# EAGLE board PCB_Sensors (EAGLE 9.6.2)
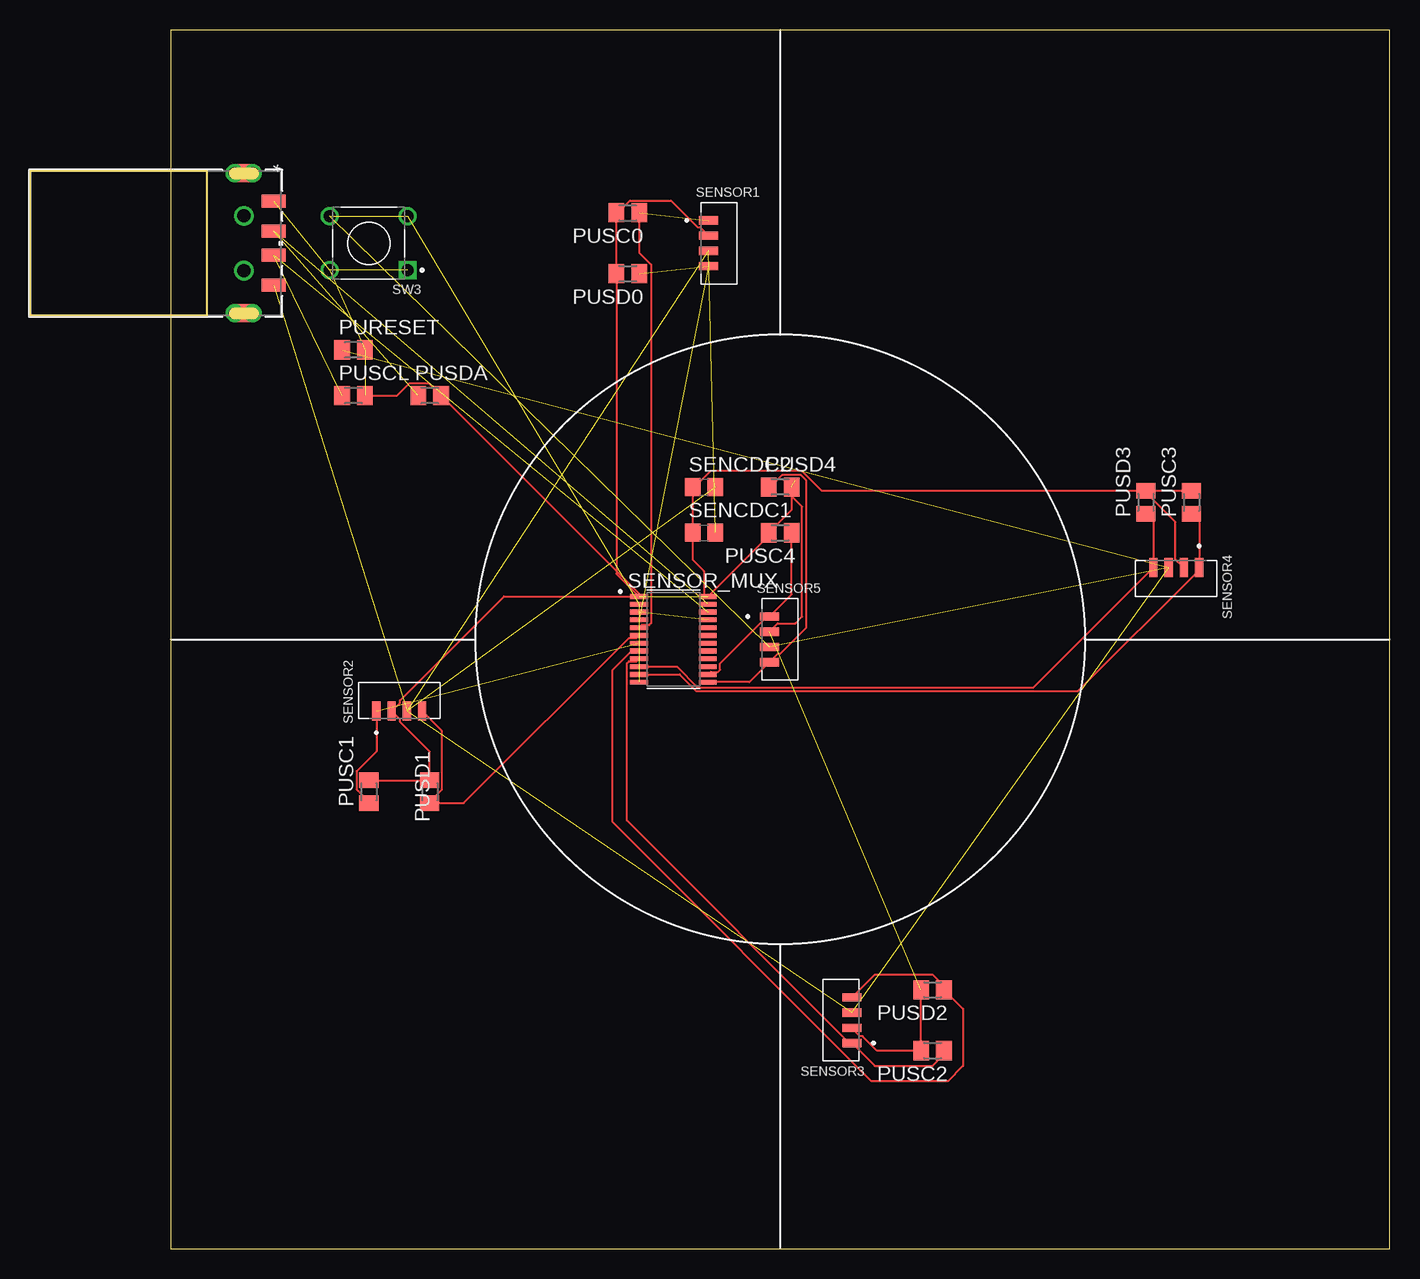
[diagram p0: board, top side]

Size 101.6 x 101.6 mm. Coordinates in mm from the lower left corner, seen from the top.
Outline: 0,0 101.6,0 101.6,101.6 0,101.6 0,0
Copper layers (1*16): Top 0.035mm / dielectric 1.5mm / Bottom 0.035mm
Design rules "default": minimum track width 6mil, minimum drill 0.35mm, track to track 6mil, track to pad 6mil, pad to pad 6mil, via to via 6mil, smd to smd 6mil, copper to edge 40mil, drill to drill 6mil, minimum pad ring 10mil, minimum via ring 8mil, stop-mask expansion 4mil, vias tented up to drill 0mil, thermal gap 10mil

## Footprints (pad centres in the part's own frame; a part is rotated, then mirrored left to right if it is on the bottom)
M0805 = smd 1.3 x 1.6: 1 -0.95,0; 2 0.95,0
C0805 = smd 1.3 x 1.5: 1 -0.95,0; 2 0.95,0
XDCR_VEML7700-TT = smd 1.6 x 0.7: 1 -0.9,1.905; 2 -0.9,0.635; 3 -0.9,-0.635; 4 -0.9,-1.905
SOP65P640X120-24N = smd 1.57 x 0.41: 1 -2.87,3.575; 2 -2.87,2.925; 3 -2.87,2.275; 4 -2.87,1.625; 5 -2.87,0.975; 6 -2.87,0.325; 7 -2.87,-0.325; 8 -2.87,-0.975; 9 -2.87,-1.625; 10 -2.87,-2.275; 11 -2.87,-2.925; 12 -2.87,-3.575; 13 2.87,-3.575; 14 2.87,-2.925; 15 2.87,-2.275; 16 2.87,-1.625; 17 2.87,-0.975; 18 2.87,-0.325; 19 2.87,0.325; 20 2.87,0.975; 21 2.87,1.625; 22 2.87,2.275; 23 2.87,2.925; 24 2.87,3.575
CONN_USB-AP-S-RA-SMT_ADM = smd 1.092 x 2.007: 1 -3.5,9.842; 2 -1,9.842; 3 1,9.842; 4 3.5,9.842 | drill 1.092 pad 1.092: 5 -2.286,7.366; 6 2.286,7.366 | smd 1.499 x 2.997: 7 -5.842,7.353; 8 5.842,7.353 | drill 0.991 pad 0.991: S_1_H1 -5.842,8.103; S_1_H2 -5.842,6.604; S_2_H1 5.842,8.103; S_2_H2 5.842,6.604
SW_1825910-6-4 = drill 0.99 square: 1 -3.25,2.25 | drill 0.99: 2 3.25,2.25; 3 -3.25,-2.25; 4 3.25,-2.25

## Placement (x,y rotation side)
PURESET  2.2k  [M0805]  15.24,74.93 0 top
PUSC0  2.2k  [M0805]  38.1,86.36 180 top
PUSC1  2.2k  [M0805]  16.51,38.1 90 top
PUSC2  2.2k  [M0805]  63.5,16.51 180 top
PUSC3  2.2k  [M0805]  85.09,62.23 90 top
PUSC4  2.2k  [M0805]  50.8,59.69 180 top
PUSCL  2.2k  [M0805]  15.24,71.12 0 top
PUSD0  2.2k  [M0805]  38.1,81.28 180 top
PUSD1  2.2k  [M0805]  21.59,38.1 90 top
PUSD2  2.2k  [M0805]  63.5,21.59 180 top
PUSD3  2.2k  [M0805]  81.28,62.23 90 top
PUSD4  2.2k  [M0805]  50.8,63.5 0 top
PUSDA  2.2k  [M0805]  21.59,71.12 0 top
SENCDC1  200pF  [C0805]  44.45,59.69 0 top
SENCDC2  200pF  [C0805]  44.45,63.5 0 top
SENSOR1  VEML7700-TT  [XDCR_VEML7700-TT]  45.72,83.82 0 top
SENSOR2  VEML7700-TT  [XDCR_VEML7700-TT]  19.05,45.72 90 top
SENSOR3  VEML7700-TT  [XDCR_VEML7700-TT]  55.88,19.05 180 top
SENSOR4  VEML7700-TT  [XDCR_VEML7700-TT]  83.82,55.88 270 top
SENSOR5  VEML7700-TT  [XDCR_VEML7700-TT]  50.8,50.8 0 top
SENSOR_MUX  TCA9548APWR  [SOP65P640X120-24N]  41.91,50.8 0 top
SENSOR_USBA_OUT  USB-AP-S-RA-SMT  [CONN_USB-AP-S-RA-SMT_ADM]  -1.27,83.82 270 top
SW3  1825910-6  [SW_1825910-6-4]  16.51,83.82 180 top

## Library data of the parts
PURESET PUSC0 PUSC1-PUSC4 PUSCL PUSD0 PUSD1-PUSD4 PUSDA = rcl; SPICEPREFIX: R
SENCDC1 SENCDC2 = rcl; SPICEPREFIX: C
SENSOR1-SENSOR5 = VEML7700-TT; AVAILABILITY: In Stock; CHECK_PRICES: https://www.snapeda.com/parts/VEML7700-TT/Vishay+Semiconductor+Opto+Division/view-part/?ref=eda; DESCRIPTION: Optical Sensor Ambient - I²C 4-SMD, J-Lead; MF: Vishay Semiconductor; MP: VEML7700-TT; PACKAGE: SMD-4 Vishay Semiconductor; PRICE: None; PURCHASE-URL: https://www.snapeda.com/api/url_track_click_mouser/?unipart_id=534245&manufacturer=Vishay Semiconductor&part_name=VEML7700-TT&search_term=veml7700; SNAPEDA_LINK: https://www.snapeda.com/parts/VEML7700-TT/Vishay+Semiconductor+Opto+Division/view-part/?ref=snap
SENSOR_MUX = TCA9548APWR; AVAILABILITY: In Stock; CHECK_PRICES: https://www.snapeda.com/parts/TCA9548APWR/Texas+Instruments/view-part/?ref=eda; DESCRIPTION: 8-channel 1.65- to 5.5-V I2C/SMBus switch with reset & voltage translation; MF: Texas Instruments; MP: TCA9548APWR; PACKAGE: TSSOP-24 Texas Instruments; PRICE: None; PURCHASE-URL: https://www.snapeda.com/api/url_track_click_mouser/?unipart_id=280817&manufacturer=Texas Instruments&part_name=TCA9548APWR&search_term=tca9548a; SNAPEDA_LINK: https://www.snapeda.com/parts/TCA9548APWR/Texas+Instruments/view-part/?ref=snap
SENSOR_USBA_OUT = USB-AP-S-RA-SMT; COPYRIGHT: Copyright (C) 2023 Ultra Librarian. All rights reserved.; MANUFACTURER_PART_NUMBER: USB-AP-S-RA-SMT; MFR_NAME: ADAM TECHNOLOGIES INC
SW3 = 1825910-6; AVAILABILITY: In Stock; CHECK_PRICES: https://www.snapeda.com/parts/1825910-6/TE+Connectivity+ALCOSWITCH+Switches/view-part/?ref=eda; COMMENT: 1825910-6; DESCRIPTION: Switch Push Button OFF (ON) SPST Round Button 0.05A 24VDC Momentary Contact PC Pins Thru-Hole; MF: TE Connectivity; MP: 1825910-6; PACKAGE: None; PRICE: None; PURCHASE-URL: https://www.snapeda.com/api/url_track_click_mouser/?unipart_id=226996&manufacturer=TE Connectivity&part_name=1825910-6&search_term=1825910-6; SNAPEDA_LINK: https://www.snapeda.com/parts/1825910-6/TE+Connectivity+ALCOSWITCH+Switches/view-part/?ref=snap

## Nets
3.3OUTCON: PURESET.2 PUSC0.2 PUSC1.2 PUSC2.2 PUSC3.2 PUSC4.2 PUSCL.2 PUSD0.2 PUSD1.2 PUSD2.2 PUSD3.2 PUSD4.2 PUSDA.2 SENCDC1.1 SENCDC2.1 SENSOR1.2 SENSOR2.2 SENSOR3.2 SENSOR4.2 SENSOR5.2 SENSOR_MUX.1 SENSOR_MUX.24 SENSOR_USBA_OUT.1 SW3.1 SW3.2
GND: PURESET.1 SENCDC1.2 SENCDC2.2 SENSOR1.3 SENSOR2.3 SENSOR3.3 SENSOR4.3 SENSOR5.3 SENSOR_MUX.2 SENSOR_MUX.3 SENSOR_MUX.12 SENSOR_MUX.21 SENSOR_USBA_OUT.4 SW3.3 SW3.4
MCUI2CSCL: PUSCL.1 SENSOR_MUX.22 SENSOR_USBA_OUT.3
MCUI2CSDA: PUSDA.1 SENSOR_MUX.23 SENSOR_USBA_OUT.2
MUXSC0: PUSC0.1 SENSOR1.1 SENSOR_MUX.5
MUXSC1: PUSC1.1 SENSOR2.1 SENSOR_MUX.7
MUXSC2: PUSC2.1 SENSOR3.1 SENSOR_MUX.9
MUXSC3: PUSC3.1 SENSOR4.1 SENSOR_MUX.11
MUXSC4: PUSC4.1 SENSOR5.1 SENSOR_MUX.14
MUXSD0: PUSD0.1 SENSOR1.4 SENSOR_MUX.4
MUXSD1: PUSD1.1 SENSOR2.4 SENSOR_MUX.6
MUXSD2: PUSD2.1 SENSOR3.4 SENSOR_MUX.8
MUXSD3: PUSD3.1 SENSOR4.4 SENSOR_MUX.10
MUXSD4: PUSD4.1 SENSOR5.4 SENSOR_MUX.13

## Tracks (layer width: path | path; a pad name or v marks a point on that pad's centre or on a via)
3.3OUTCON  (7 unrouted)
  Top 0.152: 52.07,64.09 51.03,64.09 | SENSOR5.2 50.59,52.13 52.06,52.13 52.63,52.69 52.63,61.85 51.75,62.73 PUSD4.2 51.75,61.59 PUSC4.2 49.85,59.45 SENSOR_MUX.24 44.45,54.38 44.45,56.49 43.5,57.44 SENCDC1.1 SENCDC2.1 43.68,63.5 45.01,64.83 52.62,64.83 54.27,63.18 PUSD3.2 | PUSC3.2 PUSD3.2 | SENSOR4.2 83.76,57.47 83.76,60.57 81.28,63.05 PUSD3.2 | SENSOR3.2 57.47,17.72 57.67,17.72 58.89,16.51 PUSC2.2 PUSD2.2 | PUSC1.2 PUSD1.2 21.59,41.44 19.11,43.92 19.11,44.13 SENSOR2.2 19.11,45.51 19.11,45.72 27.77,54.38 SENSOR_MUX.1 | SENSOR1.2 44.13,85.15 43.92,85.15 41.68,87.39 38.3,87.39 37.28,86.36 PUSC0.2 PUSD0.2 37.15,56.27 SENSOR_MUX.1 | SENSOR_MUX.1 39.04,54.62 22.7,70.96 PUSDA.2 21.51,72.15 19.89,72.15 18.87,71.12 PUSCL.2
GND  (14 unrouted)
MCUI2CSCL  (2 unrouted)
MCUI2CSDA  (2 unrouted)
MUXSC0  (1 unrouted)
  Top 0.152: PUSC0.1 39.05,83.05 40.05,82.05 40.05,52.16 39.89,51.99 39.26,51.99 SENSOR_MUX.5
MUXSC1  (1 unrouted)
  Top 0.152: SENSOR2.1 17.14,41.46 15.48,39.8 15.48,38.3 16.51,37.28 PUSC1.1
MUXSC2
  Top 0.152: PUSC2.1 64.45,16.19 63.5,15.24 58.69,15.24 SENSOR3.1 56.67,17.14 56.62,17.1 38.03,35.7 38.03,48.8 38.19,48.96 38.82,48.96 SENSOR_MUX.9
MUXSC3
  Top 0.152: SENSOR_MUX.11 42.42,47.88 43.8,46.49 75.64,46.49 85.72,56.58 SENSOR4.1 85.72,60.65 PUSC3.1
MUXSC4
  Top 0.152: SENSOR_MUX.14 45,48.09 45.63,48.09 45.79,48.26 45.79,48.8 49.7,52.7 SENSOR5.1 51.75,54.55 PUSC4.1
MUXSD0  (2 unrouted)
MUXSD1
  Top 0.152: SENSOR2.4 22.62,43.16 22.62,38.3 21.59,37.28 PUSD1.1 24.43,37.15 38.19,50.91 38.82,50.91 SENSOR_MUX.6
MUXSD2
  Top 0.152: SENSOR3.4 58.69,22.86 63.5,22.86 64.45,21.91 PUSD2.1 66.04,20 66.04,15.24 64.77,13.97 58.42,13.97 36.83,35.56 36.83,48.26 38.4,49.83 SENSOR_MUX.8
MUXSD3
  Top 0.152: SENSOR_MUX.10 42.2,48.52 43.93,46.79 71.93,46.79 SENSOR4.4 81.92,60.65 PUSD3.1
MUXSD4
  Top 0.152: SENSOR_MUX.13 48.23,47.23 SENSOR5.4 50.59,49.59 50.8,49.59 52.93,51.73 52.93,64.09 52.49,64.53 51.01,64.53 49.98,63.5 PUSD4.1